# EAGLE board dtmf_robot (EAGLE 6.1)
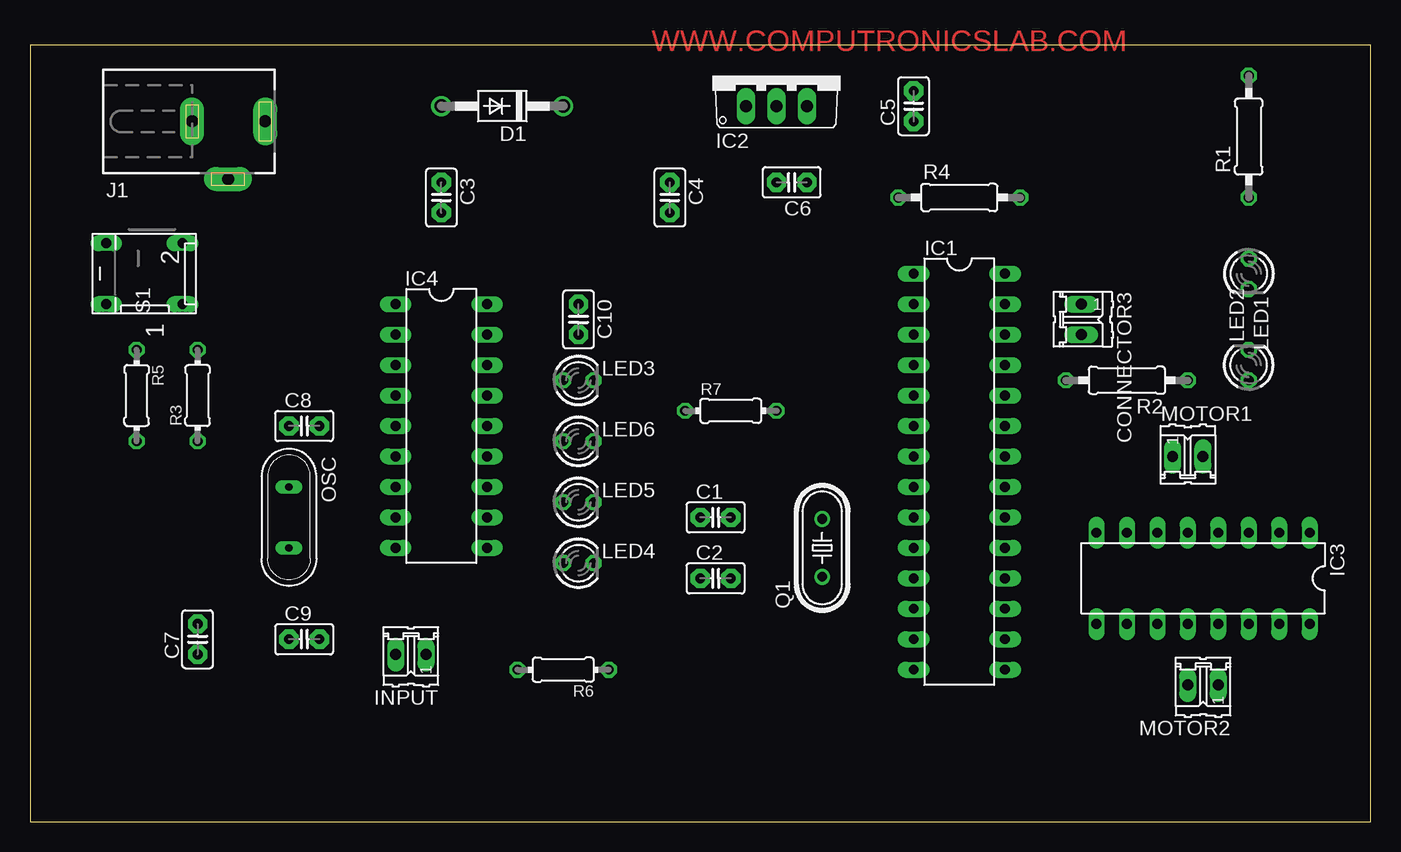
[diagram p0: board, top side]
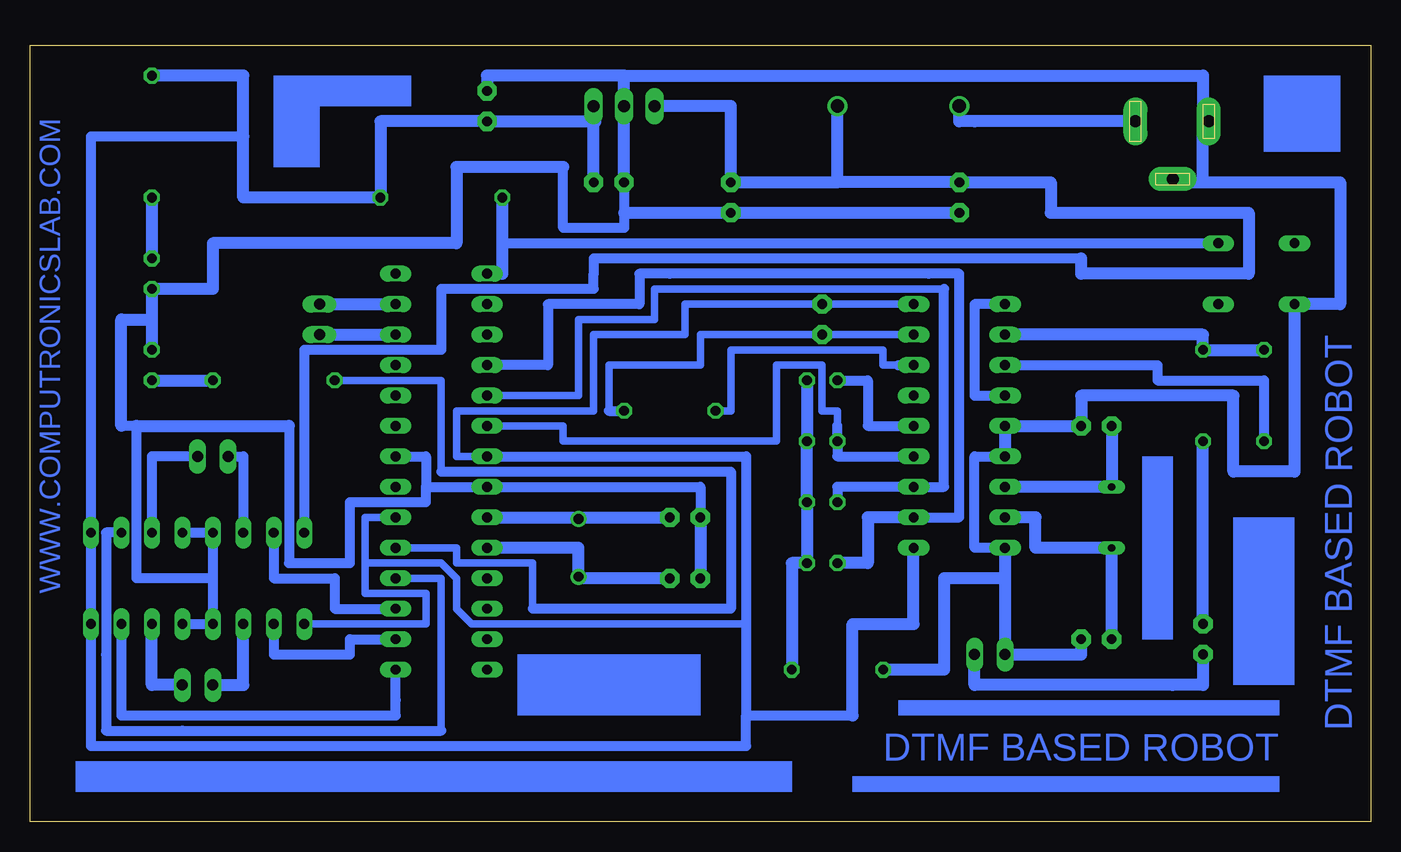
[diagram p1: board, bottom side, seen from below]

Size 111.76 x 64.76 mm. Coordinates in mm from the lower left corner, seen from the top.
Outline: 0,0 111.76,0 111.76,64.76 0,64.76 0,0
Copper layers (1*16): Top 0.035mm / dielectric 1.5mm / Bottom 0.035mm
Design rules: minimum track width 15mil, minimum drill 24mil, track to track 8mil, track to pad 8mil, pad to pad 8mil, via to via 8mil, smd to smd 8mil, copper to edge 40mil, drill to drill 8mil, minimum pad ring 10mil, minimum via ring 8mil, stop-mask expansion 4mil, vias tented up to drill 0mil, thermal gap 10mil

## Footprints (pad centres in the part's own frame; a part is rotated, then mirrored left to right if it is on the bottom)
C2.5-2 = drill 0.813 pad 1.6 octagon: 1 -1.27,0; 2 1.27,0
02P = drill 0.914 long: 1 -1.27,0; 2 1.27,0
DO41-10 = drill 1.118: A 5.08,0; C -5.08,0
DIL28-3 = drill 0.813 long: 1 -16.51,-3.81; 2 -13.97,-3.81; 3 -11.43,-3.81; 4 -8.89,-3.81; 5 -6.35,-3.81; 6 -3.81,-3.81; 7 -1.27,-3.81; 8 1.27,-3.81; 9 3.81,-3.81; 10 6.35,-3.81; 11 8.89,-3.81; 12 11.43,-3.81; 13 13.97,-3.81; 14 16.51,-3.81; 15 16.51,3.81; 16 13.97,3.81; 17 11.43,3.81; 18 8.89,3.81; 19 6.35,3.81; 20 3.81,3.81; 21 1.27,3.81; 22 -1.27,3.81; 23 -3.81,3.81; 24 -6.35,3.81; 25 -8.89,3.81; 26 -11.43,3.81; 27 -13.97,3.81; 28 -16.51,3.81
TO220V = drill 1.016 long: 1 -2.54,-2.54; 2 0,-2.54; 3 2.54,-2.54
DIL16 = drill 0.813 long: 1 -8.89,-3.81; 2 -6.35,-3.81; 3 -3.81,-3.81; 4 -1.27,-3.81; 5 1.27,-3.81; 6 3.81,-3.81; 7 6.35,-3.81; 8 8.89,-3.81; 9 8.89,3.81; 10 6.35,3.81; 11 3.81,3.81; 12 1.27,3.81; 13 -1.27,3.81; 14 -3.81,3.81; 15 -6.35,3.81; 16 -8.89,3.81
DIL18 = drill 0.813 long: 1 -10.16,-3.81; 2 -7.62,-3.81; 3 -5.08,-3.81; 4 -2.54,-3.81; 5 0,-3.81; 6 2.54,-3.81; 7 5.08,-3.81; 8 7.62,-3.81; 9 10.16,-3.81; 10 10.16,3.81; 11 7.62,3.81; 12 5.08,3.81; 13 2.54,3.81; 14 0,3.81; 15 -2.54,3.81; 16 -5.08,3.81; 17 -7.62,3.81; 18 -10.16,3.81
DCJ0303 = drill 1 pad 2 long: 1 0,3.1; 2 4.8,0; 3 0,-3
LED3MM = drill 0.813 octagon: A -1.27,0; K 1.27,0
QS = drill 0.61 long: 1 -2.54,0; 2 2.54,0
HC49/S = drill 0.813: 1 -2.413,0; 2 2.413,0
0207/10 = drill 0.813 octagon: 1 -5.08,0; 2 5.08,0
0204/7 = drill 0.813 octagon: 1 -3.81,0; 2 3.81,0
DP-02 = drill 0.813 long: 1 -2.54,-2.54; 2 2.54,-2.54; 3 2.54,3.81; 4 -2.54,3.81

## Placement (x,y rotation side)
C1  22pf  [C2.5-2]  57.15,25.4 0 top
C2  22pf  [C2.5-2]  57.15,20.32 0 top
C3  470uF  [C2.5-2]  34.29,52.07 270 top
C4  0.1uf  [C2.5-2]  53.34,52.07 270 top
C5  0.1uf  [C2.5-2]  73.66,59.69 90 top
C6  4.7uf  [C2.5-2]  63.5,53.34 180 top
C7  0.47uf  [C2.5-2]  13.97,15.24 90 top
C8  22PF  [C2.5-2]  22.86,33.02 0 top
C9  22PF  [C2.5-2]  22.86,15.24 0 top
C10  0.1UF  [C2.5-2]  45.72,41.91 270 top
CONNECTOR3  [02P]  87.63,41.91 270 top
D1  1N4007  [DO41-10]  39.37,59.69 180 top
IC1  ATMEGA328  [DIL28-3]  77.47,29.21 270 top
IC2  7805  [TO220V]  62.23,62.23 0 top
IC3  L293D  [DIL16]  97.79,20.32 180 top
IC4  CM8870CP  [DIL18]  34.29,33.02 270 top
INPUT  [02P]  31.75,13.97 180 top
J1  [DCJ0303]  16.51,58.42 270 top
LED1  3mm  [LED3MM]  101.6,45.72 270 top
LED2  3mm  [LED3MM]  101.6,38.1 90 top
LED3  3mm  [LED3MM]  45.72,36.83 0 top
LED4  3mm  [LED3MM]  45.72,21.59 0 top
LED5  3mm  [LED3MM]  45.72,26.67 0 top
LED6  3mm  [LED3MM]  45.72,31.75 0 top
MOTOR1  [02P]  96.52,30.48 0 top
MOTOR2  [02P]  97.79,11.43 180 top
OSC  3.57  [QS]  21.59,25.4 270 top
Q1  16MHZ  [HC49/S]  66.04,22.86 90 top
R1  220R  [0207/10]  101.6,57.15 90 top
R2  330R  [0207/10]  91.44,36.83 180 top
R3  10K  [0204/7]  13.97,35.56 90 top
R4  10K  [0207/10]  77.47,52.07 0 top
R5  100K  [0204/7]  8.89,35.56 270 top
R6  330E  [0204/7]  44.45,12.7 180 top
R7  100K  [0204/7]  58.42,34.29 0 top
S1  push switch  [DP-02]  10.16,45.72 90 top

## Library data of the parts
C1-C10 = capacitor-wima
CONNECTOR3 INPUT MOTOR1 MOTOR2 = con-amp-quick; OC_FARNELL: unknown; OC_NEWARK: unknown
D1 = diode
IC1 = quantum-research-group; OC_FARNELL: unknown; OC_NEWARK: unknown
IC2 = linear
IC3 = st-microelectronics; MPN: L293D; OC_FARNELL: 9589619; OC_NEWARK: 56P8249
IC4 = california-micro-devices; OC_FARNELL: unknown; OC_NEWARK: unknown
J1 = con-jack; OC_FARNELL: unknown; OC_NEWARK: unknown
LED1-LED6 = led
OSC = special
Q1 = crystal; OC_FARNELL: 1667008; OC_NEWARK: unknown
R1-R7 = rcl
S1 = switch-dil; MPN: MCDP02; OC_FARNELL: 1255233; OC_NEWARK: 26M1095

## Nets
N$1: C1.2 IC1.9 Q1.2
N$2: C2.2 IC1.10 Q1.1
N$3: D1.A J1.1
N$4: C3.1 C4.1 D1.C IC2.1 IC3.8
N$5: C1.1 C2.1 C3.2 C4.2 C5.2 C6.2 C8.2 C9.2 IC1.8 IC1.22 IC2.2 IC3.4 IC3.5 IC3.12 IC3.13 IC4.5 IC4.6 IC4.9 INPUT.2 J1.2 J1.3 LED1.K LED2.K R6.2 S1.4
N$6: LED1.A R1.1
N$7: IC1.17 IC3.7
N$8: IC1.4 IC4.11 LED4.A
N$9: IC1.5 IC4.12 LED5.A
N$10: IC1.6 IC4.13 LED6.A
N$11: IC4.14 LED3.A
N$12: CONNECTOR3.1 IC1.27
N$13: CONNECTOR3.2 IC1.26
N$15: IC1.18 IC3.2
N$16: IC1.15 IC3.15
N$20: C7.2 R3.1
N$21: IC1.16 IC3.10
N$24: C10.2 IC4.17 R7.2
N$25: IC3.14 MOTOR2.1
N$27: IC1.19 R2.2
N$28: IC3.11 MOTOR2.2
N$31: IC1.1 R4.1 S1.2
N$32: LED2.A R2.1
N$34: IC3.6 MOTOR1.1
N$35: IC3.3 MOTOR1.2
N$36: LED3.K LED4.K LED5.K LED6.K R6.1
N$37: C5.1 C6.1 C10.1 IC1.7 IC1.20 IC2.3 IC3.1 IC3.9 IC3.16 IC4.10 IC4.18 R1.2 R4.2
N$38: C7.1 INPUT.1
N$39: IC4.2 R3.2 R5.1
N$40: IC4.1 IC4.4
N$41: IC4.3 R5.2
N$42: C8.1 IC4.7 OSC.1
N$43: C9.1 IC4.8 OSC.2
N$44: IC4.16 R7.1

## Tracks (layer width: path | path; a pad name or v marks a point on that pad's centre or on a via)
N$1
  Bottom 0.381: 66.04,25.4 Q1.2
  Bottom 1.016: IC1.9 66.04,25.4 C1.2
N$2
  Bottom 0.381: 66.04,20.32 Q1.1
  Bottom 1.016: C2.2 66.04,20.32 66.04,22.86 IC1.10
N$3
  Bottom 1.016: D1.A 34.29,58.42 33.02,58.42 J1.1
N$4
  Bottom 0.813: IC3.8 88.9,39.37 77.47,39.37 77.47,44.45 64.77,44.45 64.77,45.72 64.77,46.99 24.13,46.99
  Bottom 1.016: IC2.1 53.34,59.69 C4.1 44.45,53.34 | 24.13,46.99 24.13,45.72 10.16,45.72 10.16,50.8 26.67,50.8 26.67,53.34 C3.1 44.45,53.34 | 44.45,53.34 D1.C
N$5
  Bottom 0.381: 101.6,41.91 LED2.K | 13.97,58.42 J1.3
  Bottom 0.813: IC4.6 33.02,30.48 33.02,22.86 IC4.9 | 78.74,27.94 IC1.8 55.88,27.94 C1.1 | IC1.22 78.74,30.48 78.74,27.94 | IC3.13 IC3.12 96.52,20.32 | IC3.4 IC3.5 96.52,20.32 | 104.14,33.02 102.87,33.02 102.87,20.32 96.52,20.32 | 67.31,54.61 67.31,49.53 62.23,49.53 62.23,50.8 C6.2 | 78.74,27.94 78.74,26.67 85.09,26.67 85.09,21.59 90.17,21.59 90.17,33.02
  Bottom 1.016: IC4.6 IC4.5 C8.2 24.13,35.56 11.43,35.56 11.43,29.21 6.35,29.21 S1.4 2.54,43.18 2.54,53.34 13.97,53.34 | IC4.9 30.48,20.32 | 30.48,20.32 35.56,20.32 35.56,12.7 R6.2 | 30.48,20.32 INPUT.2 24.13,13.97 C9.2 | C1.1 C2.1 | LED2.K LED1.K 96.52,44.45 96.52,48.26 76.2,48.26 76.2,54.61 67.31,54.61 | 104.14,33.02 104.14,41.91 101.6,41.91 | 13.97,53.34 16.51,53.34 J1.2 | 13.97,53.34 13.97,58.42 13.97,62.23 62.23,62.23 | C3.2 C4.2 62.23,50.8 | C6.2 IC2.2 62.23,62.23 | C5.2 73.66,62.23 62.23,62.23 | 102.87,33.02 90.17,33.02
N$6
  Bottom 1.016: R1.1 LED1.A
N$7
  Bottom 0.813: IC1.17 86.36,17.78 86.36,20.32 91.44,20.32 IC3.7
N$8
  Bottom 0.813: IC1.4 68.58,38.1 68.58,43.18 60.96,43.18 60.96,45.72 58.42,45.72 36.83,45.72 34.29,45.72 34.29,43.18 34.29,25.4 IC4.11
  Bottom 1.016: LED4.A 41.91,21.59 41.91,25.4 40.64,25.4 IC4.11
N$9
  Bottom 0.61: IC1.5 66.04,35.56 66.04,41.91 59.69,41.91 59.69,44.45 35.56,44.45
  Bottom 0.813: LED5.A 44.45,27.94 IC4.12 35.56,27.94 35.56,44.45
N$10
  Bottom 0.61: IC1.6 67.31,33.02 67.31,31.75 49.53,31.75 49.53,38.1 45.72,38.1 45.72,34.29 44.45,34.29 44.45,33.02
  Bottom 0.813: IC4.13 44.45,30.48 LED6.A 44.45,33.02
N$11
  Bottom 0.813: IC4.14 41.91,33.02 41.91,36.83 LED3.A
N$12
  Bottom 1.016: CONNECTOR3.1 IC1.27
N$13
  Bottom 1.016: CONNECTOR3.2 IC1.26
N$15
  Bottom 0.61: IC1.18 80.01,20.32 78.74,20.32 77.47,20.32 77.47,17.78 77.47,7.62
  Bottom 0.813: 77.47,7.62 99.06,7.62 105.41,7.62 105.41,13.97 105.41,24.13 IC3.2
N$16
  Bottom 0.813: IC1.15 81.28,10.16 81.28,8.89 85.09,8.89 99.06,8.89 104.14,8.89 104.14,13.97 IC3.15
N$20
  Bottom 1.016: C7.2 R3.1
N$21
  Bottom 0.813: IC1.16 85.09,15.24 85.09,13.97 86.36,13.97 91.44,13.97 IC3.10
N$24
  Bottom 0.61: IC4.17 C10.2 53.34,40.64 55.88,40.64 55.88,38.1 63.5,38.1 63.5,34.29
  Bottom 0.813: 63.5,34.29 R7.2
N$25
  Bottom 1.016: IC3.14 101.6,11.43 MOTOR2.1
N$27
  Bottom 0.61: IC1.19 76.2,22.86 76.2,21.59 69.85,21.59 69.85,17.78 | 77.47,29.21 77.47,36.83 R2.2
  Bottom 0.813: 69.85,17.78 53.34,17.78 53.34,29.21 77.47,29.21
N$28
  Bottom 1.016: IC3.11 93.98,11.43 MOTOR2.2
N$31
  Bottom 0.813: 72.39,48.26 S1.2
  Bottom 1.016: R4.1 72.39,48.26 72.39,45.72 IC1.1
N$32
  Bottom 1.016: LED2.A R2.1
N$34
  Bottom 0.813: IC3.6 93.98,30.48 MOTOR1.1
N$35
  Bottom 0.813: IC3.3 101.6,30.48 MOTOR1.2
N$36
  Bottom 1.016: LED3.K LED6.K LED5.K LED4.K 48.26,21.59 R6.1
N$37
  Bottom 0.61: IC4.18 C10.1 57.15,43.18 57.15,40.64 64.77,40.64 64.77,34.29 76.2,34.29 76.2,30.48 IC1.7 | 83.82,21.59 83.82,25.4 IC1.20 | 83.82,21.59 77.47,21.59 76.2,20.32 76.2,19.05 76.2,17.78 74.93,16.51 52.07,16.51 | IC3.9 78.74,16.51 78.74,19.05 82.55,19.05 83.82,19.05 83.82,20.32 83.82,21.59
  Bottom 0.813: 52.07,8.89 43.18,8.89 | 52.07,8.89 52.07,16.51 52.07,30.48 IC1.7 | 93.98,57.15 106.68,57.15 IC3.1 IC3.16 106.68,6.35 52.07,6.35 52.07,8.89
  Bottom 1.016: IC4.10 38.1,16.51 43.18,16.51 43.18,8.89 | C6.1 64.77,58.42 C5.1 82.55,58.42 R4.2 93.98,52.07 93.98,57.15 93.98,62.23 R1.2
  Bottom 1.27: 64.77,58.42 IC2.3
N$38
  Bottom 1.016: INPUT.1 33.02,11.43 16.51,11.43 13.97,11.43 C7.1
N$39
  Bottom 1.016: R5.1 R3.2 13.97,40.64 IC4.2
N$40
  Bottom 0.813: IC4.4 33.02,35.56 33.02,38.1 33.02,43.18 IC4.1
N$41
  Bottom 0.813: R5.2 8.89,36.83 17.78,36.83 17.78,38.1 IC4.3
N$42
  Bottom 1.016: C8.1 OSC.1 IC4.7
N$43
  Bottom 1.016: C9.1 OSC.2 27.94,22.86 27.94,25.4 IC4.8
N$44
  Bottom 0.61: 39.37,38.1 40.64,38.1 40.64,39.37 53.34,39.37 53.34,34.29 R7.1
  Bottom 0.813: 39.37,38.1 IC4.16
(copper drawn outside any net)
  shapes: Bottom area x9

## Text on the board
Top: WWW.COMPUTRONICSLAB.COM
Bottom: DTMF BASED ROBOT | WWW.COMPUTRONICSLAB.COM | DTMF BASED ROBOT